# Altium PCB CMD3_KIT.PcbDoc
Units mm, origin at the board's own origin, x right, y up, seen from the top; angles counter-clockwise.
Board outline 152.4 x 101.6 mm, 2 copper layers (Top Layer, Bottom Layer); 73 components, 98 nets, 460 pads, 0 vias.
Unrouted connection lines stored in the file: 200.
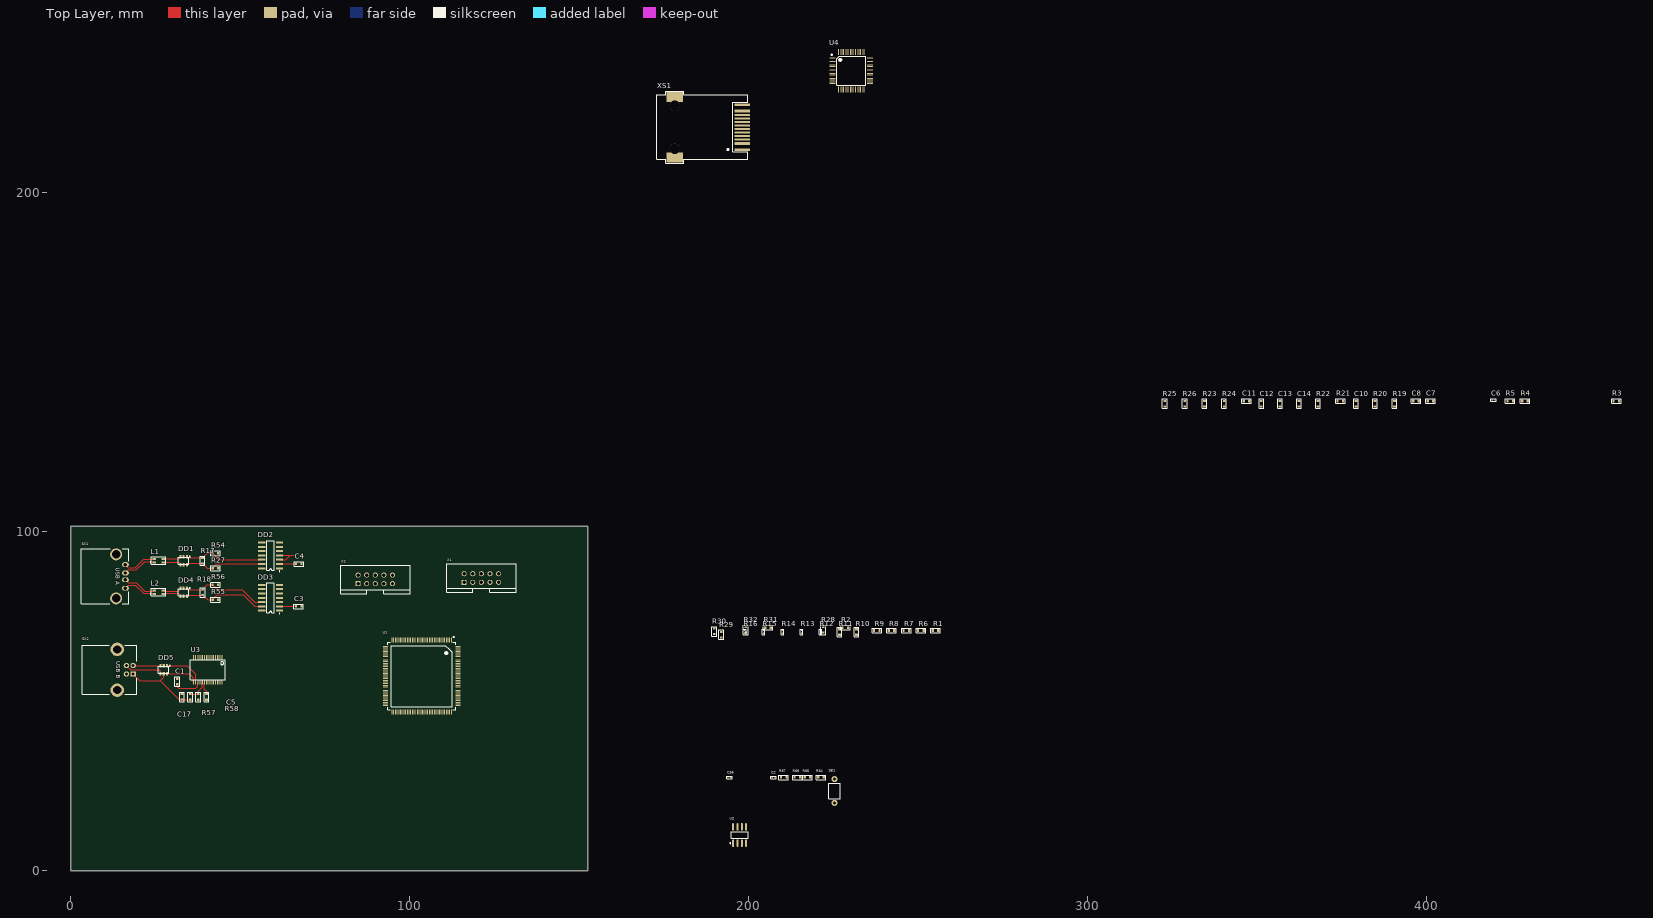
[diagram p0: Top Layer view]
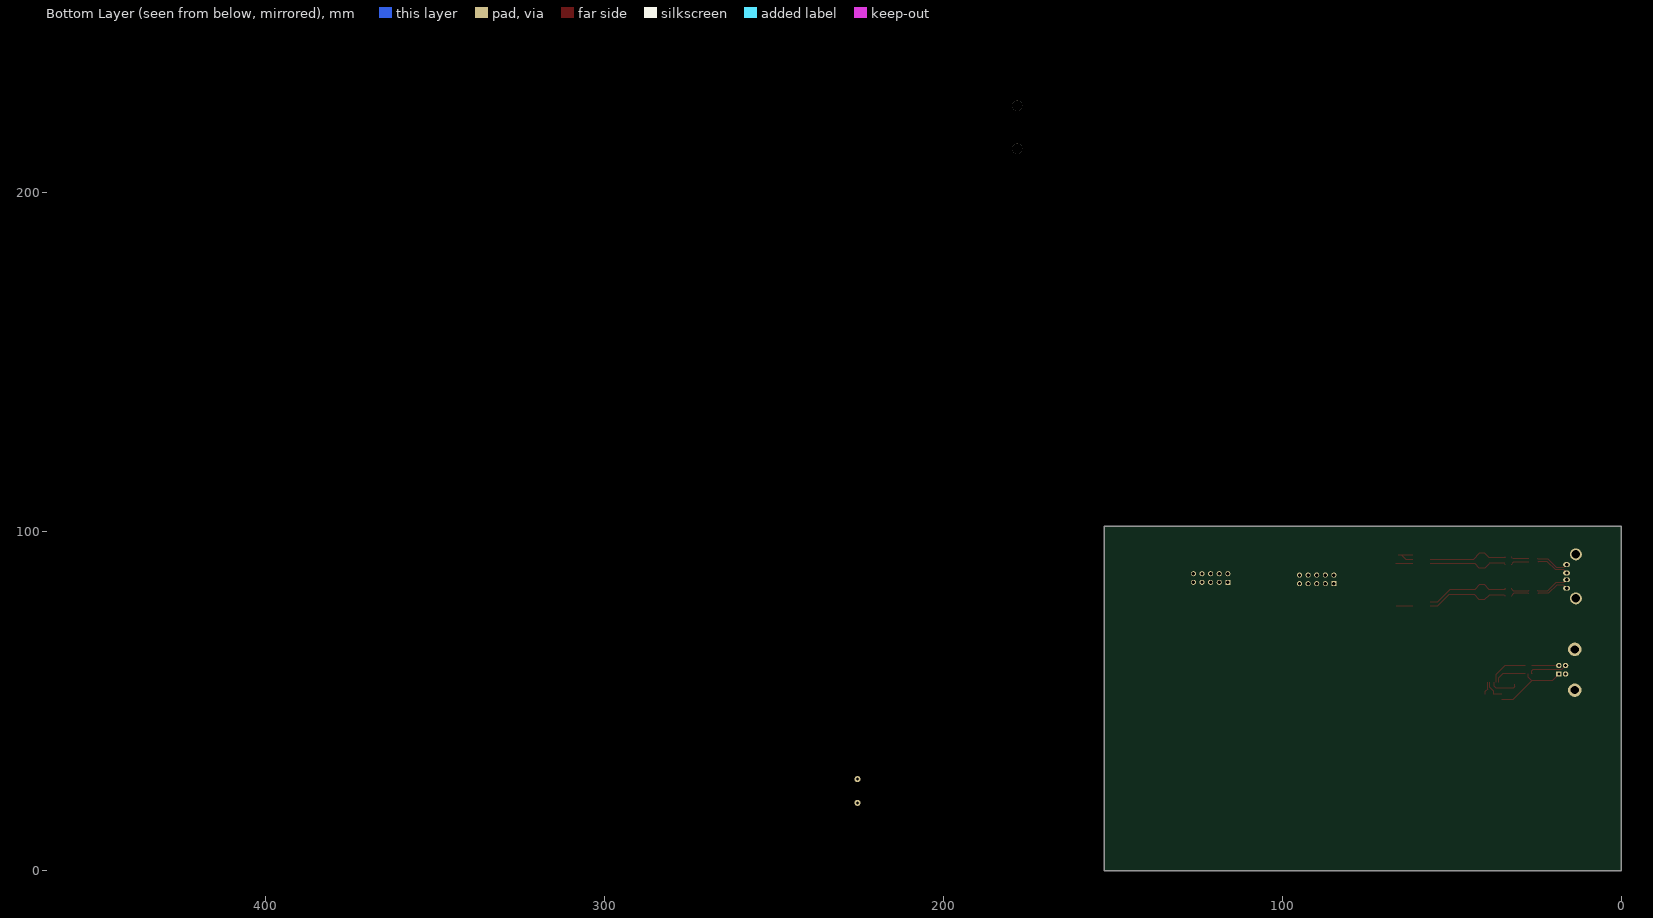
[diagram p1: Bottom Layer view, seen from below]

## Layer stack, top to bottom
Top Solder: solder mask 0.0102, Solder Resist, Dk 3.5
Top Layer: signal copper 0.0356
Dielectric 1: dielectric 0.32, FR-4, Dk 4.8
Bottom Layer: signal copper 0.0356
Bottom Solder: solder mask 0.0102, Solder Resist, Dk 3.5

## Board outline
0,0 152.4,0 152.4,101.6 0,101.6

## Design rules (kind name [scope] priority, off if disabled: settings)
Clearance [All] p1: gap=0.1 ignorepadtopadclearanceinfootprint=FALSE
DiffPairsRouting [All] p1: maxlimit=0.8 minlimit=0.2 mostfreqgap=0.4 toplayer_minwidth=0.1 toplayer_maxwidth=0.4 toplayer_prefwidth=0.2 bottomlayer_minwidth=0.1 bottomlayer_maxwidth=0.4 bottomlayer_prefwidth=0.2 maxuncoupledlength=12.7
PolygonConnect [All] p1: connectstyle=Relief reliefconductorwidth=0.254 reliefentries=4 polygonreliefangle="90 Angle" airgapwidth=0.254
RoomDefinition USB [InComponentClass('USB')] p1: confinementstyle=ConfineIn formatcopy=TRUE lockcomponents=FALSE outline 2.96,49.5 45.96,49.5 45.96,67.7 2.96,67.7
RoomDefinition C-Link_Interface [InComponentClass('C-Link_Interface')] p2: confinementstyle=ConfineIn formatcopy=TRUE lockcomponents=FALSE outline 2.6,74.6 69.6,74.6 69.6,98.6 2.6,98.6
RoomDefinition FPGA [InComponentClass('FPGA')] p3: confinementstyle=ConfineIn formatcopy=TRUE lockcomponents=FALSE outline 154.96,71.45 205.76,71.45 205.76,102.7 154.96,102.7
RoomDefinition Ethernet [InComponentClass('Ethernet')] p4: confinementstyle=ConfineIn formatcopy=TRUE lockcomponents=FALSE outline 144.2,183.6 195,183.6 195,209 144.2,209
RoutingVias [All] p1: holewidth=1 width=0.5 viastyle="Through Hole" minholewidth=0.25 minwidth=0.5 maxholewidth=4.5 maxwidth=5
SolderMaskExpansion [All] p1: expansion=0.102 istentingtop=FALSE
Width [All] p1: maxlimit=5 minlimit=0.1 preferedwidth=0.2
29 further rules are at their usual default settings.

## Classes and differential pairs
component class USB: C1 C5 C17 DD5 R57 R58 SX2 U3
component class Ethernet: C6 C7 C8 C10 C11 C12 C13 C14 L3 R3 R4 R5 R19 R20 R21 R22 R23 R24 R25 R26 U4 XS1
component class C-Link_Interface: C3 C4 DD1 DD2 DD3 DD4 L1 L2 R17 R18 R27 R54 R55 R56 SX1
component class FPGA: C2 C56 R1 R2 R6 R7 R8 R9 R10 R11 R12 R13 R14 R15 R16 R28 R29 R30 R31 R32 R64 R65 R66 R67 SB1 U1 U2 X1 X2
differential pair RI1: +RI1_P -RI1_N
differential pair RI2: +RI2_P -RI2_N

## Components (designator, comment, footprint, x,y, rotation, side; value= is the part's Value field where it differs from the comment)
C1 "0.1uF" C_0603 31.36,55.815 r90 top
C2 "0.1uF" C_0201 207.27,27.55 r0 top
C3 "0.1uF" C_0603 67.185,78 r180 top
C4 "0.1uF" C_0603 67.215,90.54 r180 top
C5 "0.1uF" C_0603 39.999,51.295 r270 top
C6 "0.1uF" C_0201 419.699,138.9 r0 top
C7 "270pF" C_0603 401.099,138.6 r0 top
C8 "270pF" C_0603 396.799,138.6 r0 top
C10 "10nF" C_0603 379.1,137.8 r90 top
C11 "0.1uF" C_0603 346.8,138.6 r0 top
C12 "0.1uF" C_0603 351.2,137.8 r90 top
C13 "0.1uF" C_0603 356.7,137.8 r90 top
C14 "0.1uF" C_0603 362.3,137.8 r90 top
C17 "10uF" C_0603 32.735,51.3 r270 top
C56 "2.2uF" C_0201 194.27,27.55 r0 top
DD1 "TPD2S017" SOT-23-6 33.24,91.465 r270 top
DD2 "DS36C200" SOIC-14 58.915,93.05 r90 top
DD3 "DS36C200" SOIC-14 58.915,80.54 r90 top
DD4 "TPD2S017" SOT-23-6 33.24,82.165 r270 top
DD5 "TPD2S017" SOT-23-6 27.36,59.3 r270 top
L1 "DLW31SN222SQ2L" Choke_Coil 25.84,91.49 r0 top
L2 "DLW31SN222SQ2L" Choke_Coil 25.84,82.19 r0 top
R1 "10K" R_0603 255.05,70.87 r0 top
R2 "390R" R_0603 228.45,71.77 r0 top
R3 "200R" R_0603 455.899,138.6 r0 top
R4 "?" R_0603 428.999,138.6 r0 top
R5 "22.1K" R_0603 424.599,138.6 r0 top
R6 "10K" R_0603 250.75,70.87 r0 top
R7 "10K" R_0603 246.45,70.87 r0 top
R8 "10K" R_0603 242.05,70.87 r0 top
R9 "10K" R_0603 237.75,70.87 r0 top
R10 "10K" R_0603 231.75,70.47 r90 top
R11 "10K" R_0603 226.75,70.47 r90 top
R12 "10K" R_0201 221.15,70.47 r90 top
R13 "10K" R_0201 215.55,70.47 r90 top
R14 "10K" R_0201 209.95,70.47 r90 top
R15 "10K" R_0201 204.35,70.47 r90 top
R16 "10K" R_0201 198.75,70.47 r90 top
R17 "130R" R_0603 38.815,91.465 r270 top
R18 "130R" R_0603 38.852,82.165 r270 top
R19 "51R" R_0603 390.5,137.8 r90 top
R20 "51R" R_0603 384.7,137.8 r90 top
R21 "180R" R_0603 374.5,138.6 r0 top
R22 "10K" R_0603 367.9,137.8 r90 top
R23 "180R" R_0603 334.4,137.8 r90 top
R24 "10K" R_0603 340.2,137.8 r90 top
R25 "180R" R_0603 322.7,137.8 r90 top
R26 "10K" R_0603 328.6,137.8 r90 top
R27 "2K2" R_0603 42.625,89.24 r180 top
R28 "10K" R_0603 221.95,71.07 r90 top
R29 "390R" R_0603 191.87,69.64 r90 top
R30 "10K" R_0603 189.77,70.65 r90 top
R31 "390R" R_0603 205.65,71.77 r0 top
R32 "10K" R_0603 199.05,71.07 r90 top
R54 "2K2" R_0603 42.592,93.695 r0 top
R55 "2K2" R_0603 42.625,79.94 r180 top
R56 "2K2" R_0603 42.592,84.395 r0 top
R57 "4K7" R_0603 35.16,51.3 r90 top
R58 "10K" R_0603 37.579,51.295 r270 top
R64 "10K" R_0603 221.27,27.55 r0 top
R65 "10K" R_0603 217.27,27.55 r0 top
R66 "10K" R_0603 214.27,27.55 r0 top
R67 "10K" R_0603 210.27,27.55 r0 top
SB1 "Text" DTS-32 225.27,23.55 r0 top
SX1 "USBA-1J" USB_A_(DS1095) 14.067,86.84 r270 top
SX2 "USBA-1J" USB_B_(DS1099) 11.36,59.3 r270 top
U1 "T8Q144C3_FPGA" "LQFP- 144" 103.47,57.45 r270 top
U2 "EPCS" SOIC8_N 197.27,10.55 r90 top
U3 "FT245R" "SSOP- 28" 40.36,59.3 r180 top
U4 "LXT972A" LQFP-64 230.2,236 r0 top
X1 "IDC-10M" IDC-10MS 121.08,86.37 r0 top
X2 "IDC-10M" IDC-10MS 89.78,85.97 r0 top
XS1 "HR961160C" HR961160C 186.8,218.6 r90 top

## Footprints (in the part's own frame and the unit in brackets; to place one, negate y for a bottom-side part, rotate by r counter-clockwise, add the part's x,y. Pads: shape width x height; smd on the part's side, far side on the other; paste and mask are expansions set on the pad)
C_0201 [mm] "SMD Body 0.6 x 0.3 mm (LxW typ)"
  rect 0.35x0.35 smd: 1(-0.4,0) 2(0.4,0)
  silkscreen extent -0.8,-0.4 0.8,0.4, body extent -0.3,-0.15 0.3,0.15, height 0.23
C_0603 [mm]
  rect 0.65x0.8 smd: 1(-0.815,0) 2(0.81,0)
  silkscreen extent -1.4,-0.7 1.4,0.7, body extent -0.8,-0.4 0.8,0.4, height 0.5
Choke_Coil [mm] "DLW31SN222SQ2L"
  rect 1.05x0.6 smd: 1(-1.325,-0.5) 2(1.325,-0.5) 3(1.325,0.5) 4(-1.325,0.5)
  silkscreen extent -2.45,-1.1 2.1,1.1, body extent -1.6,-0.81 1.6,0.81, height 1.99
DTS-32 [mm] "1 contact, 0.05A, 250V, H=5mm"
  round 1.8 hole 0.9: 1(0,3.5) 2(0,-3.5)
  silkscreen extent -1.75,-2.25 1.75,2.25, body extent -1.75,-4 1.75,4, height 5.5
HR961160C [mm]
  rect 0.81x4.6 smd: 1(-5.844,-11.264) 2(-4.004,-11.264) 11(5.536,-11.264) 12(7.376,-11.264)
  rect 0.61x4.6 smd: 3(-2.804,-11.254) 4(-1.784,-11.264) 5(-0.764,-11.264) 6(0.256,-11.264) 7(1.276,-11.264) 8(2.296,-11.264) 9(3.316,-11.264) 10(4.336,-11.264)
  rect 3x4.9 smd: Shield(-8.154,8.656) Shield(9.686,8.656)
  round 3 hole 3 unplated: ""(-5.584,8.656) ""(7.116,8.656)
  silkscreen extent -9.8,-12.9 11.4,14, body extent -8.72,-12.9 10.22,13.95, height 15.15
IDC-10MS [mm]
  rect 1.5x1.5 hole 1: 1(-5.08,-1.27)
  round 1.5 hole 1: 2(-5.08,1.27) 3(-2.54,-1.27) 4(-2.54,1.27) 5(0,-1.27) 6(0,1.27) 7(2.54,-1.27) 8(2.54,1.27) 9(5.08,-1.27) 10(5.08,1.27)
  silkscreen extent -10.16,-4.19 10.29,4.19, body extent -10.14,-4.2 10.16,4.2, height 9.3
LQFP-64 [mm] "Thin QFP, 64-Leads, Body 10x10mm, Pitch 0.5mm, IPC Medium Density"
  oval 1.8x0.2 smd: 1(-5.55,3.75) 2(-5.55,3.25) 3(-5.55,2.75) 4(-5.55,2.25) 5(-5.55,1.75) 6(-5.55,1.25) 7(-5.55,0.75) 8(-5.55,0.25) 9(-5.55,-0.25) 10(-5.55,-0.75) 11(-5.55,-1.25) 12(-5.55,-1.75) 13(-5.55,-2.25) 14(-5.55,-2.75) 15(-5.55,-3.25) 16(-5.55,-3.75) 33(5.55,-3.75) 34(5.55,-3.25) 35(5.55,-2.75) 36(5.55,-2.25) 37(5.55,-1.75) 38(5.55,-1.25) 39(5.55,-0.75) 40(5.55,-0.25) 41(5.55,0.25) 42(5.55,0.75) 43(5.55,1.25) 44(5.55,1.75) 45(5.55,2.25) 46(5.55,2.75) 47(5.55,3.25) 48(5.55,3.75)
  oval 0.2x1.8 smd: 17(-3.75,-5.55) 18(-3.25,-5.55) 19(-2.75,-5.55) 20(-2.25,-5.55) 21(-1.75,-5.55) 22(-1.25,-5.55) 23(-0.75,-5.55) 24(-0.25,-5.55) 25(0.25,-5.55) 26(0.75,-5.55) 27(1.25,-5.55) 28(1.75,-5.55) 29(2.25,-5.55) 30(2.75,-5.55) 31(3.25,-5.55) 32(3.75,-5.55) 49(3.75,5.55) 50(3.25,5.55) 51(2.75,5.55) 52(2.25,5.55) 53(1.75,5.55) 54(1.25,5.55) 55(0.75,5.55) 56(0.25,5.55) 57(-0.25,5.55) 58(-0.75,5.55) 59(-1.25,5.55) 60(-1.75,5.55) 61(-2.25,5.55) 62(-2.75,5.55) 63(-3.25,5.55) 64(-3.75,5.55)
  silkscreen extent -5.87,-4.25 4.25,4.87, body extent -6,-6 6,6, height 1.6
"LQFP- 144" [mm] "FPT-144P-M08 (20x20mm)"
  rrect25% 1.47x0.28 smd: 1(-10.67,8.75) 2(-10.67,8.25) 3(-10.67,7.75) 4(-10.67,7.25) 5(-10.67,6.75) 6(-10.67,6.25) 7(-10.67,5.75) 8(-10.67,5.25) 9(-10.67,4.75) 10(-10.67,4.25) 11(-10.67,3.75) 12(-10.67,3.25) 13(-10.67,2.75) 14(-10.67,2.25) 15(-10.67,1.75) 16(-10.67,1.25) 17(-10.67,0.75) 18(-10.67,0.25) 19(-10.67,-0.25) 20(-10.67,-0.75) 21(-10.67,-1.25) 22(-10.67,-1.75) 23(-10.67,-2.25) 24(-10.67,-2.75) 25(-10.67,-3.25) 26(-10.67,-3.75) 27(-10.67,-4.25) 28(-10.67,-4.75) 29(-10.67,-5.25) 30(-10.67,-5.75) 31(-10.67,-6.25) 32(-10.67,-6.75) 33(-10.67,-7.25) 34(-10.67,-7.75) 35(-10.67,-8.25) 36(-10.67,-8.75) 73(10.67,-8.75) 74(10.67,-8.25) 75(10.67,-7.75) 76(10.67,-7.25) 77(10.67,-6.75) 78(10.67,-6.25) 79(10.67,-5.75) 80(10.67,-5.25) 81(10.67,-4.75) 82(10.67,-4.25) 83(10.67,-3.75) 84(10.67,-3.25) 85(10.67,-2.75) 86(10.67,-2.25) 87(10.67,-1.75) 88(10.67,-1.25) 89(10.67,-0.75) 90(10.67,-0.25) 91(10.67,0.25) 92(10.67,0.75) 93(10.67,1.25) 94(10.67,1.75) 95(10.67,2.25) 96(10.67,2.75) 97(10.67,3.25) 98(10.67,3.75) 99(10.67,4.25) 100(10.67,4.75) 101(10.67,5.25) 102(10.67,5.75) 103(10.67,6.25) 104(10.67,6.75) 105(10.67,7.25) 106(10.67,7.75) 107(10.67,8.25) 108(10.67,8.75)
  rrect25% 0.28x1.47 smd: 37(-8.75,-10.67) 38(-8.25,-10.67) 39(-7.75,-10.67) 40(-7.25,-10.67) 41(-6.75,-10.67) 42(-6.25,-10.67) 43(-5.75,-10.67) 44(-5.25,-10.67) 45(-4.75,-10.67) 46(-4.25,-10.67) 47(-3.75,-10.67) 48(-3.25,-10.67) 49(-2.75,-10.67) 50(-2.25,-10.67) 51(-1.75,-10.67) 52(-1.25,-10.67) 53(-0.75,-10.67) 54(-0.25,-10.67) 55(0.25,-10.67) 56(0.75,-10.67) 57(1.25,-10.67) 58(1.75,-10.67) 59(2.25,-10.67) 60(2.75,-10.67) 61(3.25,-10.67) 62(3.75,-10.67) 63(4.25,-10.67) 64(4.75,-10.67) 65(5.25,-10.67) 66(5.75,-10.67) 67(6.25,-10.67) 68(6.75,-10.67) 69(7.25,-10.67) 70(7.75,-10.67) 71(8.25,-10.67) 72(8.75,-10.67) 109(8.75,10.67) 110(8.25,10.67) 111(7.75,10.67) 112(7.25,10.67) 113(6.75,10.67) 114(6.25,10.67) 115(5.75,10.67) 116(5.25,10.67) 117(4.75,10.67) 118(4.25,10.67) 119(3.75,10.67) 120(3.25,10.67) 121(2.75,10.67) 122(2.25,10.67) 123(1.75,10.67) 124(1.25,10.67) 125(0.75,10.67) 126(0.25,10.67) 127(-0.25,10.67) 128(-0.75,10.67) 129(-1.25,10.67) 130(-1.75,10.67) 131(-2.25,10.67) 132(-2.75,10.67) 133(-3.25,10.67) 134(-3.75,10.67) 135(-4.25,10.67) 136(-4.75,10.67) 137(-5.25,10.67) 138(-5.75,10.67) 139(-6.25,10.67) 140(-6.75,10.67) 141(-7.25,10.67) 142(-7.75,10.67) 143(-8.25,10.67) 144(-8.75,10.67)
  silkscreen extent -11.62,-10 10,10, body extent -11,-11 11,11, height 1.6
R_0201 [mm] "SMD Body 0.6 x 0.3 mm (LxW typ)"
  rect 0.35x0.35 smd: 1(-0.4,0) 2(0.4,0)
  silkscreen extent -0.8,-0.4 0.8,0.4, body extent -0.3,-0.15 0.3,0.15, height 0.23
R_0603 [mm]
  rect 0.65x0.8 smd: 1(-0.815,0) 2(0.81,0)
  silkscreen extent -1.4,-0.7 1.4,0.7, body extent -0.8,-0.4 0.8,0.4, height 0.47
SOIC8_N [mm] "SOIC, 8-Leads, Body 4.9x3.9mm, Pitch 1.27mm, IPC Medium Density"
  oval 2.2x0.6 smd: 1(-2.4,1.905) 2(-2.4,0.635) 3(-2.4,-0.635) 4(-2.4,-1.905) 5(2.4,-1.905) 6(2.4,-0.635) 7(2.4,0.635) 8(2.4,1.905)
  silkscreen extent -2.52,-2.5 0.9,2.88, body extent -1.95,-2.45 1.95,2.45, height 1.75
SOIC-14 [mm] "Small Outline; 14 Leads; Body Width 3.9 mm; Pitch 1.27 mm"
  rect 0.6x2.2 smd: 1(-3.81,-2.6) 2(-2.54,-2.6) 3(-1.27,-2.6) 4(0,-2.6) 5(1.27,-2.6) 6(2.54,-2.6) 7(3.81,-2.6) 8(3.81,2.6) 9(2.54,2.6) 10(1.27,2.6) 11(0,2.6) 12(-1.27,2.6) 13(-2.54,2.6) 14(-3.81,2.6)
  silkscreen extent -4.78,-2.72 4.38,1.1, body extent -4.32,-3.02 4.32,3.17, height 1.7
SOT-23-6 [mm]
  rect 1.1x0.65 smd: 1(-1.2,0.95) 2(-1.2,0) 3(-1.2,-0.95) 4(1.2,-0.95) 5(1.2,0) 6(1.2,0.95)
  silkscreen extent -1.32,-1.55 1,1.95, body extent -0.9,-1.55 0.9,1.55, height 1.45
"SSOP- 28" [mm]
  rect 0.348x1.397 smd: 1(-4.225,-3.656) 2(-3.575,-3.656) 3(-2.925,-3.656) 4(-2.275,-3.656) 5(-1.625,-3.656) 6(-0.975,-3.656) 7(-0.325,-3.656) 8(0.325,-3.656) 9(0.975,-3.656) 10(1.625,-3.656) 11(2.275,-3.656) 12(2.925,-3.656) 13(3.575,-3.656) 14(4.225,-3.656) 15(4.225,3.656) 16(3.575,3.656) 17(2.925,3.656) 18(2.275,3.656) 19(1.625,3.656) 20(0.975,3.656) 21(0.325,3.656) 22(-0.325,3.656) 23(-0.975,3.656) 24(-1.625,3.656) 25(-2.275,3.656) 26(-2.925,3.656) 27(-3.575,3.656) 28(-4.225,3.656)
  silkscreen extent -5.2,-2.93 5.2,2.93, body extent -5.1,-3.9 5.1,3.9, height 1.95
USB_A_(DS1095) [mm]
  oval 1.4x2 hole 1: 1(-3.5,2) 2(-1,2) 3(1,2) 4(3.5,2)
  round 3.5 hole 2.5: 5(-6.5,-0.75) 6(6.5,-0.75)
  silkscreen extent -8.1,-11 8.1,3, body extent -8.12,-10.99 8.12,3.01, height 7.66
USB_B_(DS1099) [mm]
  rect 1.6x1.6 hole 0.9: 1(1.25,6.99)
  round 1.6 hole 0.9: 2(-1.25,6.99) 3(-1.25,4.99) 4(1.25,4.99)
  round 4 hole 2.4: 5(-6.02,2.28) 6(6.02,2.28)
  silkscreen extent -7.25,-8 7.25,8, body extent -6.6,-7.87 6.52,8.07, height 11

## Part data
C1 C2 C3 C4 C5 C6 C7 C8 C10 C11 C12 C13 C14 C17 C56: library part C, "Non-polarised capacitor", ComponentLink1Description="Manufacturer Link", ComponentLink1URL=www.murata.com, ComponentLink2Description="Datasheet Link", ComponentLink2URL=http://www.murata.com/products/catalog/pdf/c02e.pdf
L1 L2: library part L_1
R1 R2 R3 R4 R5 R6 R7 R8 R9 R10 R11 R12 R13 R14 R15 R16 R17 R18 R19 R20 R21 R22 R23 R24 R25 R26 R27 R28 R29 R30 R31 R32 R54 R55 R56 R57 R58 R64 R65 R66 R67: library part R
SB1: library part Button, Published=17.04.2014, Publisher="Andrew Danich", Type=Переключатель
U1: library part "Trion_T8Q144 FPGA", "Trion T8 FPGA"
U2: "Serial Configuration (EPCS) Devices"
U4: "10/100 Ethernet Transceiver"

## Nets (pads, with @x,y where several pads share a name; then routed paths per layer and width w, separated by ;. In a path a pad name is that pad's centre, name@x,y a point inside that pad or via, vN(x,y) a via of type N, cw(c..) or ccw(c..) an arc to the next point about the centre after c; other vN are vias at no path point)
3V3OUT: C1.1 U3.17 | length 8.4
  Top Layer w0.3: C1.1 31.36,54.3 31.86,53.8 36.76,53.8 37.435,54.475 U3.17
+2.5V: X1.4 X1.6
+3.3V: C2.1 C11.1 C12.1 C13.1 C14.1 C56.1 R22.2 R26.2 R64.2 R65.2 R66.2 R67.2 U2.3 U2.7 U2.8 U3.4 U4.4 U4.8 U4.21 U4.22 U4.40 U4.51 X2.4 XS1.1 XS1.12
+3z3: DD1.5 DD4.5
+?: R1.2 R6.2 R7.2 R8.2 R9.2 R10.2 R11.2 R12.2 R13.2 R14.2 R15.2 R16.2
\RESET: R57.2 R58.1 U3.19 | length 6.4
  Top Layer w0.3: R57.2 R58.1 37.58,52.92 38.735,54.075 U3.19
C-LINK_CLK: DD3.1 R2.1 R2.2 R28.1
C-LINK_DATA: DD2.1 R29.1 R29.2 R30.1
C-LINK_TX/RX: DD2.3 DD2.4 R31.1 R31.2 R32.1 | length 7.8
  Top Layer w0.3: DD2.3 63.355,91.78 64.625,93.05 ; DD2.4 64.625,93.05 ; 65.715,93.04 65.705,93.05 64.625,93.05
CDONE: R1.1 U1.34 X2.3
CLink_VCC: C3.2 C4.2 DD2.2 DD3.2 R27.1 R55.1 | length 9.8
  Top Layer w0.3: DD3.2 C3.2 ; DD2.2 61.53,90.525 66.39,90.525 C4.2
COL: U4.62
CRS: U4.63
CS: R7.1 U1.31 U2.1 X1.8 X2.8
CSO: U1.33 X2.6
GND: C1.2 C2.2 C3.1 C4.1 C5.2 C6.2 C10.2 C11.2 C12.2 C13.2 C14.2 C17.1 C56.2 DD1.2 DD2.5 DD3.3 DD3.4 DD3.5 DD4.2 DD5.2 R3.2 R4.2 R24.2 R28.2 R30.2 R32.2 R54.2 R56.2 R58.2 SB1.2 SX1.5 SX1.6 SX2.4 SX2.5 SX2.6 U1.1 U1.5 U1.9 U1.37 U1.44 U1.50 U1.64 U1.94 U1.104 U1.108 U1.120 U1.121 U1.126 U1.127 U1.129 U1.133 U2.4 U3.7 U3.18 U3.21 U3.25 U3.26 U4.5 U4.6 U4.7 U4.11 U4.12 U4.13 U4.14 U4.15 U4.16 U4.18 U4.25 U4.26 U4.32 U4.33 U4.34 U4.35 U4.39 U4.41 U4.50 U4.61 X1.2 X1.10 X2.2 X2.10 XS1.10 XS1.Shield
LED/CFG1: R21.1 U4.38
LED/CFG2: R23.1 U4.37
LED/CFG3: R25.1 U4.36
LED_1: R21.2 R22.1 XS1.2
LED_3: R25.2 R26.1 XS1.11
MDC: U4.43
MDDIS: U4.3
MDINT: U4.64
MDIO: U4.42
NetC6_1: C6.1 XS1.5
NetC7_1: C7.1 XS1.7
NetC8_1: C8.1 XS1.8
NetC10_1: C10.1 R19.2 R20.2
NetDD1_1: DD1.1 DD2.12 R17.1 R54.1 | length 23.9
  Top Layer w0.3: DD1.1 34.19,92.464 34.365,92.289 R17.1@38.806,92.289 ; R17.1 38.89,92.28 39.065,92.455 39.065,92.568 40.201,93.704 R54.1@41.769,93.704 ; R54.1 41.777,93.62 43.617,91.78 DD2.12
NetDD1_3: DD1.3 L1.3 | length 5.5
  Top Layer w0.3: L1.3@27.174,91.999 31.774,91.999 32.04,92.265 32.115,92.265 32.29,92.44 DD1.3
NetDD1_4: DD1.4 L1.2 | length 5.6
  Top Layer w0.3: L1.2@27.174,90.999 31.774,90.999 32.108,90.665 32.115,90.665 32.29,90.49 DD1.4
NetDD1_6: DD1.6 DD2.13 R17.2 R27.2 | length 23.6
  Top Layer w0.3: DD1.6 34.19,90.489 34.365,90.664 R17.2@38.806,90.664 ; R17.2@38.824,90.664 38.881,90.664 39.065,90.48 39.065,90.423 40.239,89.249 R27.2@41.806,89.249 ; R27.2 41.815,89.315 43.01,90.51 DD2.13
NetDD3_12: DD3.12 DD4.1 R18.1 R56.1 | length 25.2
  Top Layer w0.3: DD4.1 34.19,83.155 34.365,82.98 R18.1 40.268,84.395 R56.1 41.777,84.32 43.157,82.94 50.585,82.94 54.255,79.27 DD3.12
NetDD3_13: DD3.13 DD4.6 R18.2 R55.2 | length 25
  Top Layer w0.3: DD4.6 34.19,81.13 34.415,81.355 38.89,81.355 40.305,79.94 R55.2 41.815,80.015 43.195,81.395 50.86,81.395 54.255,78 DD3.13
NetDD4_3: DD4.3 L2.3 | length 5.7
  Top Layer w0.2: L2.3 27.365,82.49 31.415,82.49 31.64,82.49 32.065,82.915 32.29,83.14 DD4.3
NetDD4_4: DD4.4 L2.2 | length 5.7
  Top Layer w0.2: L2.2 27.365,81.89 31.365,81.89 31.59,81.89 32.065,81.415 32.29,81.19 DD4.4
NetDD5_1: DD5.1 U3.16 | length 11.9
  Top Layer w0.3: DD5.1 34.26,60.5 36.785,57.975 U3.16
NetDD5_3: DD5.3 SX2.2 | length 8.1
  Top Layer w0.3: SX2.2 26.36,60.55 DD5.3
NetDD5_4: DD5.4 SX2.3 | length 11.8
  Top Layer w0.3: SX2.3 17.6,59.3 26.06,59.3 26.41,58.95 DD5.4 DD5.4@26.279,58.231
NetDD5_6: DD5.6 U3.15 | length 9.6
  Top Layer w0.3: DD5.6 34.96,58.1 36.135,56.925 U3.15
NetR4_1: R4.1 R5.1
NetR5_2: R5.2 U4.17
NetR9_1: R9.1 U1.32
NetR12_1: R12.1 U1.80
NetR13_1: R13.1 U1.79
NetR14_1: R14.1 U1.78
NetR15_1: R15.1 U1.77
NetR16_1: R16.1 U1.74
NetR23_2: R23.2 R24.1
NetU1_2: U1.2 U1.13 U1.22 U1.49 U1.57 U1.73 U1.85 U1.96 U1.107 U1.125 U1.128 U1.130
Quartz_25MHz: R3.1 U4.1
RESET: R6.1 SB1.1 U1.35 X1.7 X2.5
RI1_N: L1.4 SX1.1 | length 9.9
  Top Layer w0.3: SX1.1@16.065,90.34 SX1.1 16.667,89.74 16.667,89.616 16.843,89.44 19.025,89.44 21.42,91.835 ; 21.459,91.849 24.374,91.849 L1.4
RI1_P: L1.1 SX1.2 | length 10
  Top Layer w0.3: SX1.2@16.065,87.84 SX1.2 16.667,88.44 16.667,88.564 16.843,88.74 19.315,88.74 21.724,91.149 23.964,91.149 23.973,91.14 24.365,91.14 L1.1
RI2_N: L2.4 SX1.3 | length 9.9
  Top Layer w0.3: SX1.3@16.065,85.84 SX1.3 16.843,84.94 19.315,84.94 21.724,82.531 23.964,82.531 23.973,82.54 24.365,82.54 L2.4
RI2_P: L2.1 SX1.4 | length 9.9
  Top Layer w0.3: SX1.4@16.065,83.34 SX1.4 16.843,84.24 19.025,84.24 21.42,81.845 ; 21.459,81.831 24.374,81.831 L2.1
RX_CLK: U4.52
RX_D0: U4.48
RX_D1: U4.47
RX_D2: U4.46
RX_D3: U4.45
RX_DV: U4.49
RX_ER: U4.53
SCK: R8.1 U1.30 U2.6 X2.1
SDI: R10.1 U1.29 U2.5 X2.9
SDO: R11.1 U1.28 U2.2 X2.7
TCK: R64.1 U1.26 X1.1
TDI: R65.1 U1.27 X1.9
TDO: R66.1 U1.24 X1.3
TMS: R67.1 U1.25 X1.5
TPIN: C8.2 R20.1 U4.24
TPIP: C7.2 R19.1 U4.23
TPON: U4.20 XS1.4
TPOP: U4.19 XS1.3
TRST: U4.31
TX_CLK: U4.55
TX_D0: U4.57
TX_D1: U4.58
TX_D2: U4.59
TX_D3: U4.60
TX_EN: U4.56
TX_ER: U4.54
USB_D0: U3.1
USB_D1: U3.5
USB_D2: U3.3
USB_D3: U3.11
USB_D4: U3.2
USB_D5: U3.9
USB_D6: U3.10
USB_D7: U3.6
USB_Power: C17.2 DD5.5 R57.1 SX2.1 | length 22.4
  Top Layer w0.3: SX2.1 20.3,56.1 26.36,56.1 ; DD5.5 27.36,57.1 26.36,56.1 ; R57.1 35.157,50.488 31.972,50.488 26.36,56.1
USB_PWREN: U3.12
USB_RD: U3.13
USB_RFX: U3.23
USB_TXE: U3.22
USB_VCC: C5.1 U3.20 | length 3.8
  Top Layer w0.3: U3.20 39.385,53.575 39.999,52.961 C5.1
USB_WR: U3.14
pads on no net: DD2.6 DD2.7 DD2.8 DD2.9 DD2.10 DD2.11 DD2.14 DD3.6 DD3.7 DD3.8 DD3.9 DD3.10 DD3.11 DD3.14 U1.3 U1.4 U1.6 U1.7 U1.8 U1.10 U1.11 U1.12 U1.14 U1.15 U1.16 U1.17 U1.18 U1.19 U1.20 U1.21 U1.23 U1.36 U1.38 U1.39 U1.40 U1.41 U1.42 U1.43 U1.45 U1.46 U1.47 U1.48 U1.51 U1.52 U1.53 U1.54 U1.55 U1.56 U1.58 U1.59 U1.60 U1.61 U1.62 U1.63 U1.65 U1.66 U1.67 U1.68 U1.69 U1.70 U1.71 U1.72 U1.75 U1.76 U1.81 U1.82 U1.83 U1.84 U1.86 U1.87 U1.88 U1.89 U1.90 U1.91 U1.92 U1.93 U1.95 U1.97 U1.98 U1.99 U1.100 U1.101 U1.102 U1.103 U1.105 U1.106 U1.109 U1.110 U1.111 U1.112 U1.113 U1.114 U1.115 U1.116 U1.117 U1.118 U1.119 U1.122 U1.123 U1.124 U1.131 U1.132 U1.134 U1.135 U1.136 U1.137 U1.138 U1.139 U1.140 U1.141 U1.142 U1.143 U1.144 U3.8 U3.24 U3.27 U3.28 U4.2 U4.9 U4.10 U4.27 U4.28 U4.29 U4.30 U4.44 XS1. XS1.6 XS1.9

## Text inside footprints (layer, text, board x,y; h text height)
SX1: Top Overlay "USB A" at 12.767,89.39 h2 r270
SX2: Top Overlay "USB B" at 12.96,61.8 h2 r270
X1: Mechanical 7 "1" at 113.58,84.62 h1
X2: Mechanical 7 "1" at 82.28,84.22 h1